# EAGLE board Qwiic Twist-Panel (EAGLE 9.2.1), part 1 of 3
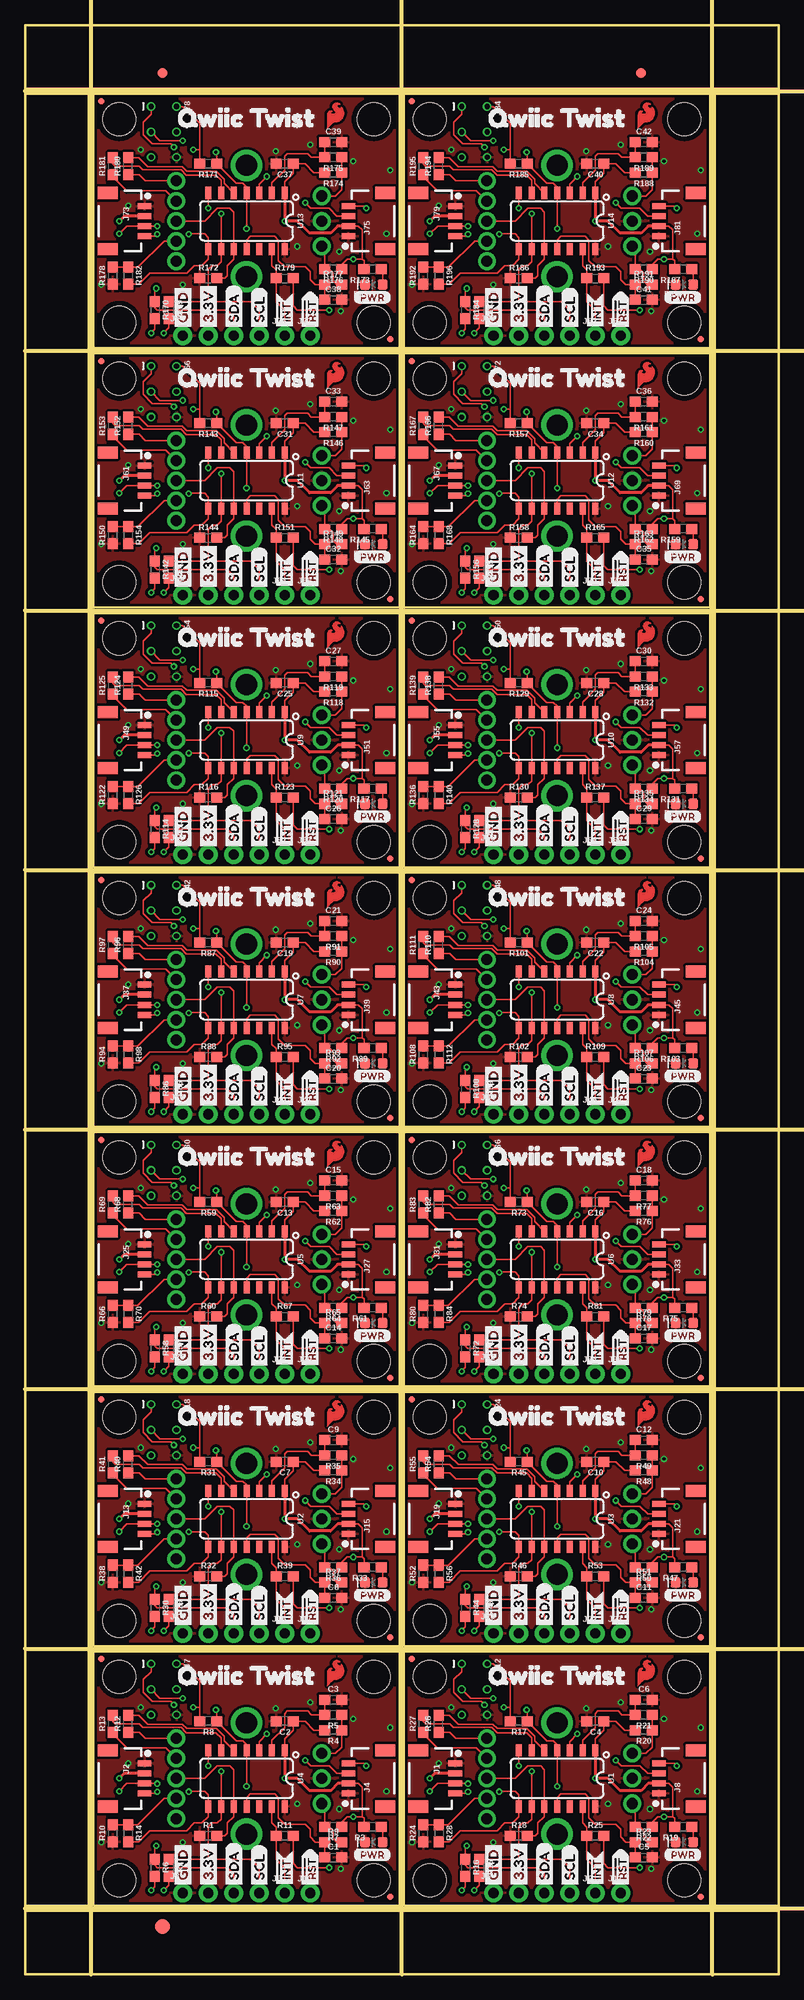
[diagram p0: board, top side]
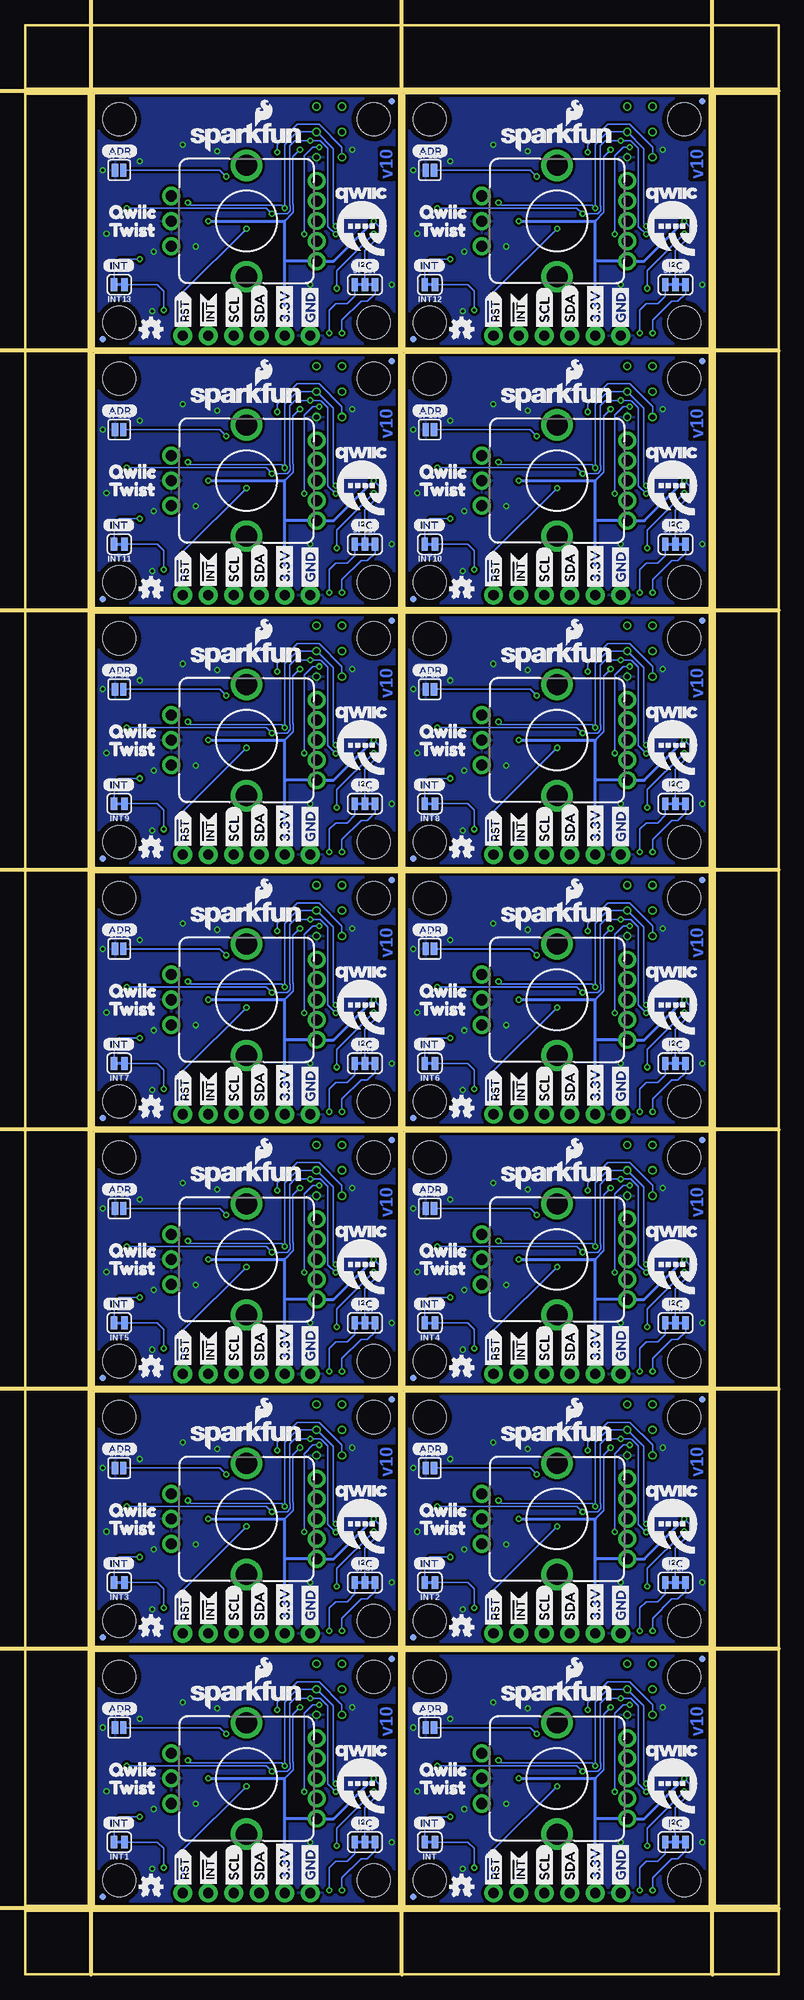
[diagram p1: board, bottom side, seen from below]

Size 75.18 x 194.56 mm. Coordinates in mm from the lower left corner, seen from the top.
Outline: 6.86,6.86 6.86,32.26 37.34,32.26 37.34,6.86 6.86,6.86
Outline: 37.85,6.86 37.85,32.26 68.33,32.26 68.33,6.86 37.85,6.86
Outline: 6.86,32.77 6.86,58.17 37.34,58.17 37.34,32.77 6.86,32.77
Outline: 37.85,32.77 37.85,58.17 68.33,58.17 68.33,32.77 37.85,32.77
Outline: 6.86,58.67 6.86,84.07 37.34,84.07 37.34,58.67 6.86,58.67
Outline: 37.85,58.67 37.85,84.07 68.33,84.07 68.33,58.67 37.85,58.67
Outline: 6.86,84.58 6.86,109.98 37.34,109.98 37.34,84.58 6.86,84.58
Outline: 37.85,84.58 37.85,109.98 68.33,109.98 68.33,84.58 37.85,84.58
Outline: 6.86,110.49 6.86,135.89 37.34,135.89 37.34,110.49 6.86,110.49
Outline: 37.85,110.49 37.85,135.89 68.33,135.89 68.33,110.49 37.85,110.49
Outline: 6.86,136.4 6.86,161.8 37.34,161.8 37.34,136.4 6.86,136.4
Outline: 37.85,136.4 37.85,161.8 68.33,161.8 68.33,136.4 37.85,136.4
Outline: 6.86,162.31 6.86,187.71 37.34,187.71 37.34,162.31 6.86,162.31
Outline: 37.85,162.31 37.85,187.71 68.33,187.71 68.33,162.31 37.85,162.31
Outline: 0,6.35 75.18,6.35 75.18,0 0,0 0,6.35
Outline: 68.83,187.71 75.18,187.71 75.18,6.86 68.83,6.86 68.83,187.71
Outline: 0,194.56 75.18,194.56 75.18,188.21 0,188.21 0,194.56
Outline: 0,187.71 6.35,187.71 6.35,6.86 0,6.86 0,187.71
Copper layers (1*16): Top 0.035mm / dielectric 1.5mm / Bottom 0.035mm
Design rules "SparkFun-2-layer-PCBWay-LIMIT": minimum track width 6mil, minimum drill 0.3mm, track to track 6mil, track to pad 6mil, pad to pad 6mil, via to via 6mil, smd to smd 6mil, copper to edge 6mil, drill to drill 6mil, minimum pad ring 6mil, minimum via ring 6mil, stop-mask expansion 4mil, vias tented up to drill 25mil, thermal gap 10mil
Milling: 11 lines

## Footprints (pad centres in the part's own frame; a part is rotated, then mirrored left to right if it is on the bottom)
0603 = smd 1.1 x 1: 1 -0.85,0; 2 0.85,0
LED-0603 = smd 1 x 1: A -0.877,0; C 0.877,0
FIDUCIAL-1X2 = smd 1 x 1: 1 0,0
FIDUCIAL-1.5X3 = smd 1.5 x 1.5: 1 0,0
SMT-JUMPER_2_NC_TRACE_SILK = smd 0.635 x 1.27: 1 -0.508,0; 2 0.508,0
1X04_1MM_RA = smd 0.6 x 1.35: 1 -1.5,0; 2 -0.5,0; 3 0.5,0; 4 1.5,0 | smd 1.2 x 2: NC1 2.8,-3.675; NC2 -2.8,-3.675
1X04_NO_SILK = drill 1.016 pad 1.88: 1 0,0; 2 2.54,0; 3 5.08,0; 4 7.62,0
1X01_NO_SILK = drill 1.016 pad 1.88: 1 0,0
2X3_TEST_POINTS = drill 0.508: 1 -2.54,-1.27; 2 -2.54,1.27; 3 0,-1.27; 4 0,1.27; 5 2.54,-1.27; 6 2.54,1.27
MICRO-FIDUCIAL = smd 0.635 x 0.635: 1 0,0
STAND-OFF = hole 3.302: 0,0
SMT-JUMPER_2_NO_SILK = smd 0.635 x 1.27: 1 -0.406,0; 2 0.406,0
SMT-JUMPER_3_2-NC_TRACE_SILK = smd 0.635 x 1.27: 1 -1.016,0; 2 0,0; 3 1.016,0
ENCODER_LED_3_KIT = drill 1.1 pad 1.778: 1 -4,7; 2 -2,7; 3 0,7; 4 2,7; 5 4,7 | drill 1.1 pad 1.8: A -2.5,-7.5; B 2.5,-7.5; C 0,-7.5 | drill 2.1: M1 -5.55,0; M2 5.55,0
SO14 = smd 0.6 x 1.2: 1 -3.175,-2.8; 2 -1.905,-2.8; 3 -0.635,-2.8; 4 0.635,-2.8; 5 1.905,-2.8; 6 3.175,-2.8; 7 4.445,-2.8; 8 4.445,2.8; 9 3.175,2.8; 10 1.905,2.8; 11 0.635,2.8; 12 -0.635,2.8; 13 -1.905,2.8; 14 -3.175,2.8

## Placement (x,y rotation side)
C1  10nF  [0603]  30.73,11.68 0 top
C2  0.1uF  [0603]  25.91,25.27 180 top
C3  10nF  [0603]  30.73,27.43 0 top
C4  0.1uF  [0603]  56.9,25.27 180 top
C5  10nF  [0603]  61.72,11.68 0 top
C6  10nF  [0603]  61.72,27.43 0 top
C7  0.1uF  [0603]  25.91,51.18 180 top
C8  10nF  [0603]  30.73,37.59 0 top
C9  10nF  [0603]  30.73,53.34 0 top
C10  0.1uF  [0603]  56.9,51.18 180 top
C11  10nF  [0603]  61.72,37.59 0 top
C12  10nF  [0603]  61.72,53.34 0 top
C13  0.1uF  [0603]  25.91,77.09 180 top
C14  10nF  [0603]  30.73,63.5 0 top
C15  10nF  [0603]  30.73,79.25 0 top
C16  0.1uF  [0603]  56.9,77.09 180 top
C17  10nF  [0603]  61.72,63.5 0 top
C18  10nF  [0603]  61.72,79.25 0 top
C19  0.1uF  [0603]  25.91,103 180 top
C20  10nF  [0603]  30.73,89.41 0 top
C21  10nF  [0603]  30.73,105.16 0 top
C22  0.1uF  [0603]  56.9,103 180 top
C23  10nF  [0603]  61.72,89.41 0 top
C24  10nF  [0603]  61.72,105.16 0 top
C25  0.1uF  [0603]  25.91,128.91 180 top
C26  10nF  [0603]  30.73,115.32 0 top
C27  10nF  [0603]  30.73,131.06 0 top
C28  0.1uF  [0603]  56.9,128.91 180 top
C29  10nF  [0603]  61.72,115.32 0 top
C30  10nF  [0603]  61.72,131.06 0 top
C31  0.1uF  [0603]  25.91,154.81 180 top
C32  10nF  [0603]  30.73,141.22 0 top
C33  10nF  [0603]  30.73,156.97 0 top
C34  0.1uF  [0603]  56.9,154.81 180 top
C35  10nF  [0603]  61.72,141.22 0 top
C36  10nF  [0603]  61.72,156.97 0 top
C37  0.1uF  [0603]  25.91,180.72 180 top
C38  10nF  [0603]  30.73,167.13 0 top
C39  10nF  [0603]  30.73,182.88 0 top
C40  0.1uF  [0603]  56.9,180.72 180 top
C41  10nF  [0603]  61.72,167.13 0 top
C42  10nF  [0603]  61.72,182.88 0 top
D1  RED  [LED-0603]  34.8,13.21 180 top
D2  RED  [LED-0603]  65.79,13.21 180 top
D3  RED  [LED-0603]  34.8,39.12 180 top
D4  RED  [LED-0603]  65.79,39.12 180 top
D5  RED  [LED-0603]  34.8,65.02 180 top
D6  RED  [LED-0603]  65.79,65.02 180 top
D7  RED  [LED-0603]  34.8,90.93 180 top
D8  RED  [LED-0603]  65.79,90.93 180 top
D9  RED  [LED-0603]  34.8,116.84 180 top
D10  RED  [LED-0603]  65.79,116.84 180 top
D11  RED  [LED-0603]  34.8,142.75 180 top
D12  RED  [LED-0603]  65.79,142.75 180 top
D13  RED  [LED-0603]  34.8,168.66 180 top
D14  RED  [LED-0603]  65.79,168.66 180 top
E$1  [FIDUCIAL-1X2]  13.72,189.8 0 top
E$2  [FIDUCIAL-1X2]  61.47,189.8 0 top
E$3  [FIDUCIAL-1.5X3]  13.72,4.76 0 top
INT  [SMT-JUMPER_2_NC_TRACE_SILK]  34.8,13.21 180 bottom
INT1  [SMT-JUMPER_2_NC_TRACE_SILK]  65.79,13.21 180 bottom
INT2  [SMT-JUMPER_2_NC_TRACE_SILK]  34.8,39.12 180 bottom
INT3  [SMT-JUMPER_2_NC_TRACE_SILK]  65.79,39.12 180 bottom
INT4  [SMT-JUMPER_2_NC_TRACE_SILK]  34.8,65.02 180 bottom
INT5  [SMT-JUMPER_2_NC_TRACE_SILK]  65.79,65.02 180 bottom
INT6  [SMT-JUMPER_2_NC_TRACE_SILK]  34.8,90.93 180 bottom
INT7  [SMT-JUMPER_2_NC_TRACE_SILK]  65.79,90.93 180 bottom
INT8  [SMT-JUMPER_2_NC_TRACE_SILK]  34.8,116.84 180 bottom
INT9  [SMT-JUMPER_2_NC_TRACE_SILK]  65.79,116.84 180 bottom
INT10  [SMT-JUMPER_2_NC_TRACE_SILK]  34.8,142.75 180 bottom
INT11  [SMT-JUMPER_2_NC_TRACE_SILK]  65.79,142.75 180 bottom
INT12  [SMT-JUMPER_2_NC_TRACE_SILK]  34.8,168.66 180 bottom
INT13  [SMT-JUMPER_2_NC_TRACE_SILK]  65.79,168.66 180 bottom
J1  [1X04_1MM_RA]  42.93,19.56 270 top
J2  [1X04_1MM_RA]  11.94,19.56 270 top
J3  PTH  [1X04_NO_SILK]  15.75,8.13 0 top
J4  [1X04_1MM_RA]  32.26,19.56 90 top
J5  [1X01_NO_SILK]  25.91,8.13 0 top
J6  PTH  [1X04_NO_SILK]  46.74,8.13 0 top
J7  ISP  [2X3_TEST_POINTS]  13.84,28.45 270 top
J8  [1X04_1MM_RA]  63.25,19.56 90 top
J9  [1X01_NO_SILK]  56.9,8.13 0 top
J10  [1X01_NO_SILK]  28.45,8.13 0 top
J11  [1X01_NO_SILK]  59.44,8.13 0 top
J12  ISP  [2X3_TEST_POINTS]  44.83,28.45 270 top
J13  [1X04_1MM_RA]  11.94,45.47 270 top
J14  PTH  [1X04_NO_SILK]  15.75,34.04 0 top
J15  [1X04_1MM_RA]  32.26,45.47 90 top
J16  [1X01_NO_SILK]  25.91,34.04 0 top
J17  [1X01_NO_SILK]  28.45,34.04 0 top
J18  ISP  [2X3_TEST_POINTS]  13.84,54.36 270 top
J19  [1X04_1MM_RA]  42.93,45.47 270 top
J20  PTH  [1X04_NO_SILK]  46.74,34.04 0 top
J21  [1X04_1MM_RA]  63.25,45.47 90 top
J22  [1X01_NO_SILK]  56.9,34.04 0 top
J23  [1X01_NO_SILK]  59.44,34.04 0 top
J24  ISP  [2X3_TEST_POINTS]  44.83,54.36 270 top
J25  [1X04_1MM_RA]  11.94,71.37 270 top
J26  PTH  [1X04_NO_SILK]  15.75,59.94 0 top
J27  [1X04_1MM_RA]  32.26,71.37 90 top
J28  [1X01_NO_SILK]  25.91,59.94 0 top
J29  [1X01_NO_SILK]  28.45,59.94 0 top
J30  ISP  [2X3_TEST_POINTS]  13.84,80.26 270 top
J31  [1X04_1MM_RA]  42.93,71.37 270 top
J32  PTH  [1X04_NO_SILK]  46.74,59.94 0 top
J33  [1X04_1MM_RA]  63.25,71.37 90 top
J34  [1X01_NO_SILK]  56.9,59.94 0 top
J35  [1X01_NO_SILK]  59.44,59.94 0 top
J36  ISP  [2X3_TEST_POINTS]  44.83,80.26 270 top
J37  [1X04_1MM_RA]  11.94,97.28 270 top
J38  PTH  [1X04_NO_SILK]  15.75,85.85 0 top
J39  [1X04_1MM_RA]  32.26,97.28 90 top
J40  [1X01_NO_SILK]  25.91,85.85 0 top
J41  [1X01_NO_SILK]  28.45,85.85 0 top
J42  ISP  [2X3_TEST_POINTS]  13.84,106.17 270 top
J43  [1X04_1MM_RA]  42.93,97.28 270 top
J44  PTH  [1X04_NO_SILK]  46.74,85.85 0 top
J45  [1X04_1MM_RA]  63.25,97.28 90 top
J46  [1X01_NO_SILK]  56.9,85.85 0 top
J47  [1X01_NO_SILK]  59.44,85.85 0 top
J48  ISP  [2X3_TEST_POINTS]  44.83,106.17 270 top
J49  [1X04_1MM_RA]  11.94,123.19 270 top
J50  PTH  [1X04_NO_SILK]  15.75,111.76 0 top
J51  [1X04_1MM_RA]  32.26,123.19 90 top
J52  [1X01_NO_SILK]  25.91,111.76 0 top
J53  [1X01_NO_SILK]  28.45,111.76 0 top
J54  ISP  [2X3_TEST_POINTS]  13.84,132.08 270 top
J55  [1X04_1MM_RA]  42.93,123.19 270 top
J56  PTH  [1X04_NO_SILK]  46.74,111.76 0 top
J57  [1X04_1MM_RA]  63.25,123.19 90 top
J58  [1X01_NO_SILK]  56.9,111.76 0 top
J59  [1X01_NO_SILK]  59.44,111.76 0 top
J60  ISP  [2X3_TEST_POINTS]  44.83,132.08 270 top
J61  [1X04_1MM_RA]  11.94,149.1 270 top
J62  PTH  [1X04_NO_SILK]  15.75,137.67 0 top
J63  [1X04_1MM_RA]  32.26,149.1 90 top
J64  [1X01_NO_SILK]  25.91,137.67 0 top
J65  [1X01_NO_SILK]  28.45,137.67 0 top
J66  ISP  [2X3_TEST_POINTS]  13.84,157.99 270 top
J67  [1X04_1MM_RA]  42.93,149.1 270 top
J68  PTH  [1X04_NO_SILK]  46.74,137.67 0 top
J69  [1X04_1MM_RA]  63.25,149.1 90 top
J70  [1X01_NO_SILK]  56.9,137.67 0 top
J71  [1X01_NO_SILK]  59.44,137.67 0 top
J72  ISP  [2X3_TEST_POINTS]  44.83,157.99 270 top
J73  [1X04_1MM_RA]  11.94,175.01 270 top
J74  PTH  [1X04_NO_SILK]  15.75,163.58 0 top
J75  [1X04_1MM_RA]  32.26,175.01 90 top
J76  [1X01_NO_SILK]  25.91,163.58 0 top
J77  [1X01_NO_SILK]  28.45,163.58 0 top
J78  ISP  [2X3_TEST_POINTS]  13.84,183.9 270 top
J79  [1X04_1MM_RA]  42.93,175.01 270 top
J80  PTH  [1X04_NO_SILK]  46.74,163.58 0 top
J81  [1X04_1MM_RA]  63.25,175.01 90 top
J82  [1X01_NO_SILK]  56.9,163.58 0 top
J83  [1X01_NO_SILK]  59.44,163.58 0 top
J84  ISP  [2X3_TEST_POINTS]  44.83,183.9 270 top
JP1  FIDUCIALUFIDUCIAL  [MICRO-FIDUCIAL]  7.62,31.5 0 bottom
JP2  FIDUCIALUFIDUCIAL  [MICRO-FIDUCIAL]  36.45,7.75 0 top
JP3  STAND-OFF  [STAND-OFF]  9.4,29.72 0 top
JP4  STAND-OFF  [STAND-OFF]  34.8,29.72 0 top
JP5  FIDUCIALUFIDUCIAL  [MICRO-FIDUCIAL]  36.45,7.75 0 bottom
JP6  FIDUCIALUFIDUCIAL  [MICRO-FIDUCIAL]  7.62,31.5 0 top
JP7  ADR  [SMT-JUMPER_2_NO_SILK]  34.8,24.64 0 bottom
JP8  STAND-OFF  [STAND-OFF]  40.39,29.72 0 top
JP9  [SMT-JUMPER_3_2-NC_TRACE_SILK]  10.29,13.21 0 bottom
JP10  STAND-OFF  [STAND-OFF]  65.79,29.72 0 top
JP11  STAND-OFF  [STAND-OFF]  9.4,9.4 0 top
JP12  FIDUCIALUFIDUCIAL  [MICRO-FIDUCIAL]  67.44,7.75 0 top
JP13  STAND-OFF  [STAND-OFF]  34.8,9.4 0 top
JP14  FIDUCIALUFIDUCIAL  [MICRO-FIDUCIAL]  38.61,31.5 0 top
JP15  FIDUCIALUFIDUCIAL  [MICRO-FIDUCIAL]  67.44,7.75 0 bottom
JP16  ADR  [SMT-JUMPER_2_NO_SILK]  65.79,24.64 0 bottom
JP17  [SMT-JUMPER_3_2-NC_TRACE_SILK]  41.27,13.21 0 bottom
JP18  STAND-OFF  [STAND-OFF]  40.39,9.4 0 top
JP19  STAND-OFF  [STAND-OFF]  65.79,9.4 0 top
JP20  FIDUCIALUFIDUCIAL  [MICRO-FIDUCIAL]  38.61,31.5 0 bottom
JP21  STAND-OFF  [STAND-OFF]  9.4,55.63 0 top
JP22  STAND-OFF  [STAND-OFF]  34.8,55.63 0 top
JP23  FIDUCIALUFIDUCIAL  [MICRO-FIDUCIAL]  36.45,33.66 0 top
JP24  FIDUCIALUFIDUCIAL  [MICRO-FIDUCIAL]  7.62,57.4 0 top
JP25  FIDUCIALUFIDUCIAL  [MICRO-FIDUCIAL]  36.45,33.66 0 bottom
JP26  ADR  [SMT-JUMPER_2_NO_SILK]  34.8,50.55 0 bottom
JP27  [SMT-JUMPER_3_2-NC_TRACE_SILK]  10.29,39.12 0 bottom
JP28  STAND-OFF  [STAND-OFF]  9.4,35.31 0 top
JP29  STAND-OFF  [STAND-OFF]  34.8,35.31 0 top
JP30  FIDUCIALUFIDUCIAL  [MICRO-FIDUCIAL]  7.62,57.4 0 bottom
JP31  STAND-OFF  [STAND-OFF]  40.39,55.63 0 top
JP32  STAND-OFF  [STAND-OFF]  65.79,55.63 0 top
JP33  FIDUCIALUFIDUCIAL  [MICRO-FIDUCIAL]  67.44,33.66 0 top
JP34  FIDUCIALUFIDUCIAL  [MICRO-FIDUCIAL]  38.61,57.4 0 top
JP35  FIDUCIALUFIDUCIAL  [MICRO-FIDUCIAL]  67.44,33.66 0 bottom
JP36  ADR  [SMT-JUMPER_2_NO_SILK]  65.79,50.55 0 bottom
JP37  [SMT-JUMPER_3_2-NC_TRACE_SILK]  41.27,39.12 0 bottom
JP38  STAND-OFF  [STAND-OFF]  40.39,35.31 0 top
JP39  STAND-OFF  [STAND-OFF]  65.79,35.31 0 top
JP40  FIDUCIALUFIDUCIAL  [MICRO-FIDUCIAL]  38.61,57.4 0 bottom
JP41  STAND-OFF  [STAND-OFF]  9.4,81.53 0 top
JP42  STAND-OFF  [STAND-OFF]  34.8,81.53 0 top
JP43  FIDUCIALUFIDUCIAL  [MICRO-FIDUCIAL]  36.45,59.56 0 top
JP44  FIDUCIALUFIDUCIAL  [MICRO-FIDUCIAL]  7.62,83.31 0 top
JP45  FIDUCIALUFIDUCIAL  [MICRO-FIDUCIAL]  36.45,59.56 0 bottom
JP46  ADR  [SMT-JUMPER_2_NO_SILK]  34.8,76.45 0 bottom
JP47  [SMT-JUMPER_3_2-NC_TRACE_SILK]  10.29,65.02 0 bottom
JP48  STAND-OFF  [STAND-OFF]  9.4,61.21 0 top
JP49  STAND-OFF  [STAND-OFF]  34.8,61.21 0 top
JP50  FIDUCIALUFIDUCIAL  [MICRO-FIDUCIAL]  7.62,83.31 0 bottom
JP51  STAND-OFF  [STAND-OFF]  40.39,81.53 0 top
JP52  STAND-OFF  [STAND-OFF]  65.79,81.53 0 top
JP53  FIDUCIALUFIDUCIAL  [MICRO-FIDUCIAL]  67.44,59.56 0 top
JP54  FIDUCIALUFIDUCIAL  [MICRO-FIDUCIAL]  38.61,83.31 0 top
JP55  FIDUCIALUFIDUCIAL  [MICRO-FIDUCIAL]  67.44,59.56 0 bottom
JP56  ADR  [SMT-JUMPER_2_NO_SILK]  65.79,76.45 0 bottom
JP57  [SMT-JUMPER_3_2-NC_TRACE_SILK]  41.27,65.02 0 bottom
JP58  STAND-OFF  [STAND-OFF]  40.39,61.21 0 top
JP59  STAND-OFF  [STAND-OFF]  65.79,61.21 0 top
JP60  FIDUCIALUFIDUCIAL  [MICRO-FIDUCIAL]  38.61,83.31 0 bottom
JP61  STAND-OFF  [STAND-OFF]  9.4,107.44 0 top
JP62  STAND-OFF  [STAND-OFF]  34.8,107.44 0 top
JP63  FIDUCIALUFIDUCIAL  [MICRO-FIDUCIAL]  36.45,85.47 0 top
JP64  FIDUCIALUFIDUCIAL  [MICRO-FIDUCIAL]  7.62,109.22 0 top
JP65  FIDUCIALUFIDUCIAL  [MICRO-FIDUCIAL]  36.45,85.47 0 bottom
JP66  ADR  [SMT-JUMPER_2_NO_SILK]  34.8,102.36 0 bottom
JP67  [SMT-JUMPER_3_2-NC_TRACE_SILK]  10.29,90.93 0 bottom
JP68  STAND-OFF  [STAND-OFF]  9.4,87.12 0 top
JP69  STAND-OFF  [STAND-OFF]  34.8,87.12 0 top
JP70  FIDUCIALUFIDUCIAL  [MICRO-FIDUCIAL]  7.62,109.22 0 bottom
JP71  STAND-OFF  [STAND-OFF]  40.39,107.44 0 top
JP72  STAND-OFF  [STAND-OFF]  65.79,107.44 0 top
JP73  FIDUCIALUFIDUCIAL  [MICRO-FIDUCIAL]  67.44,85.47 0 top
JP74  FIDUCIALUFIDUCIAL  [MICRO-FIDUCIAL]  38.61,109.22 0 top
JP75  FIDUCIALUFIDUCIAL  [MICRO-FIDUCIAL]  67.44,85.47 0 bottom
JP76  ADR  [SMT-JUMPER_2_NO_SILK]  65.79,102.36 0 bottom
JP77  [SMT-JUMPER_3_2-NC_TRACE_SILK]  41.27,90.93 0 bottom
JP78  STAND-OFF  [STAND-OFF]  40.39,87.12 0 top
JP79  STAND-OFF  [STAND-OFF]  65.79,87.12 0 top
JP80  FIDUCIALUFIDUCIAL  [MICRO-FIDUCIAL]  38.61,109.22 0 bottom
JP81  STAND-OFF  [STAND-OFF]  9.4,133.35 0 top
JP82  STAND-OFF  [STAND-OFF]  34.8,133.35 0 top
JP83  FIDUCIALUFIDUCIAL  [MICRO-FIDUCIAL]  36.45,111.38 0 top
JP84  FIDUCIALUFIDUCIAL  [MICRO-FIDUCIAL]  7.62,135.13 0 top
JP85  FIDUCIALUFIDUCIAL  [MICRO-FIDUCIAL]  36.45,111.38 0 bottom
JP86  ADR  [SMT-JUMPER_2_NO_SILK]  34.8,128.27 0 bottom
JP87  [SMT-JUMPER_3_2-NC_TRACE_SILK]  10.29,116.84 0 bottom
JP88  STAND-OFF  [STAND-OFF]  9.4,113.03 0 top
JP89  STAND-OFF  [STAND-OFF]  34.8,113.03 0 top
JP90  FIDUCIALUFIDUCIAL  [MICRO-FIDUCIAL]  7.62,135.13 0 bottom
JP91  STAND-OFF  [STAND-OFF]  40.39,133.35 0 top
JP92  STAND-OFF  [STAND-OFF]  65.79,133.35 0 top
JP93  FIDUCIALUFIDUCIAL  [MICRO-FIDUCIAL]  67.44,111.38 0 top
JP94  FIDUCIALUFIDUCIAL  [MICRO-FIDUCIAL]  38.61,135.13 0 top
JP95  FIDUCIALUFIDUCIAL  [MICRO-FIDUCIAL]  67.44,111.38 0 bottom
JP96  ADR  [SMT-JUMPER_2_NO_SILK]  65.79,128.27 0 bottom
JP97  [SMT-JUMPER_3_2-NC_TRACE_SILK]  41.27,116.84 0 bottom
JP98  STAND-OFF  [STAND-OFF]  40.39,113.03 0 top
JP99  STAND-OFF  [STAND-OFF]  65.79,113.03 0 top
JP100  FIDUCIALUFIDUCIAL  [MICRO-FIDUCIAL]  38.61,135.13 0 bottom
JP101  STAND-OFF  [STAND-OFF]  9.4,159.26 0 top
JP102  STAND-OFF  [STAND-OFF]  34.8,159.26 0 top
JP103  FIDUCIALUFIDUCIAL  [MICRO-FIDUCIAL]  36.45,137.29 0 top
JP104  FIDUCIALUFIDUCIAL  [MICRO-FIDUCIAL]  7.62,161.04 0 top
JP105  FIDUCIALUFIDUCIAL  [MICRO-FIDUCIAL]  36.45,137.29 0 bottom
JP106  ADR  [SMT-JUMPER_2_NO_SILK]  34.8,154.18 0 bottom
JP107  [SMT-JUMPER_3_2-NC_TRACE_SILK]  10.29,142.75 0 bottom
JP108  STAND-OFF  [STAND-OFF]  9.4,138.94 0 top
JP109  STAND-OFF  [STAND-OFF]  34.8,138.94 0 top
JP110  FIDUCIALUFIDUCIAL  [MICRO-FIDUCIAL]  7.62,161.04 0 bottom
JP111  STAND-OFF  [STAND-OFF]  40.39,159.26 0 top
JP112  STAND-OFF  [STAND-OFF]  65.79,159.26 0 top
JP113  FIDUCIALUFIDUCIAL  [MICRO-FIDUCIAL]  67.44,137.29 0 top
JP114  FIDUCIALUFIDUCIAL  [MICRO-FIDUCIAL]  38.61,161.04 0 top
JP115  FIDUCIALUFIDUCIAL  [MICRO-FIDUCIAL]  67.44,137.29 0 bottom
JP116  ADR  [SMT-JUMPER_2_NO_SILK]  65.79,154.18 0 bottom
JP117  [SMT-JUMPER_3_2-NC_TRACE_SILK]  41.27,142.75 0 bottom
JP118  STAND-OFF  [STAND-OFF]  40.39,138.94 0 top
JP119  STAND-OFF  [STAND-OFF]  65.79,138.94 0 top
JP120  FIDUCIALUFIDUCIAL  [MICRO-FIDUCIAL]  38.61,161.04 0 bottom
JP121  STAND-OFF  [STAND-OFF]  9.4,185.17 0 top
JP122  STAND-OFF  [STAND-OFF]  34.8,185.17 0 top
JP123  FIDUCIALUFIDUCIAL  [MICRO-FIDUCIAL]  36.45,163.19 0 top
JP124  FIDUCIALUFIDUCIAL  [MICRO-FIDUCIAL]  7.62,186.94 0 top
JP125  FIDUCIALUFIDUCIAL  [MICRO-FIDUCIAL]  36.45,163.19 0 bottom
JP126  ADR  [SMT-JUMPER_2_NO_SILK]  34.8,180.09 0 bottom
JP127  [SMT-JUMPER_3_2-NC_TRACE_SILK]  10.29,168.66 0 bottom
JP128  STAND-OFF  [STAND-OFF]  9.4,164.85 0 top
JP129  STAND-OFF  [STAND-OFF]  34.8,164.85 0 top
JP130  FIDUCIALUFIDUCIAL  [MICRO-FIDUCIAL]  7.62,186.94 0 bottom
JP131  STAND-OFF  [STAND-OFF]  40.39,185.17 0 top
JP132  STAND-OFF  [STAND-OFF]  65.79,185.17 0 top
JP133  FIDUCIALUFIDUCIAL  [MICRO-FIDUCIAL]  67.44,163.19 0 top
JP134  FIDUCIALUFIDUCIAL  [MICRO-FIDUCIAL]  38.61,186.94 0 top
JP135  FIDUCIALUFIDUCIAL  [MICRO-FIDUCIAL]  67.44,163.19 0 bottom
JP136  ADR  [SMT-JUMPER_2_NO_SILK]  65.79,180.09 0 bottom
JP137  [SMT-JUMPER_3_2-NC_TRACE_SILK]  41.27,168.66 0 bottom
JP138  STAND-OFF  [STAND-OFF]  40.39,164.85 0 top
JP139  STAND-OFF  [STAND-OFF]  65.79,164.85 0 top
JP140  FIDUCIALUFIDUCIAL  [MICRO-FIDUCIAL]  38.61,186.94 0 bottom
LOGO1  OSHW-LOGOMINI  [OSHW-LOGO-MINI]  31.62,8.76 0 bottom
LOGO2  SFE_LOGO_NAME_FLAME.1_INCH  [SFE_LOGO_NAME_FLAME_.1]  22.1,27.94 0 bottom
LOGO3  SFE_LOGO_FLAME.1EXP  [SFE_LOGO_FLAME_COPPER_EXPOSED_.1]  30.99,30.1 0 top
LOGO4  OSHW-LOGOMINI  [OSHW-LOGO-MINI]  62.61,8.76 0 bottom
LOGO5  SFE_LOGO_NAME_FLAME.1_INCH  [SFE_LOGO_NAME_FLAME_.1]  53.09,27.94 0 bottom
LOGO6  SFE_LOGO_FLAME.1EXP  [SFE_LOGO_FLAME_COPPER_EXPOSED_.1]  61.98,30.1 0 top
LOGO7  OSHW-LOGOMINI  [OSHW-LOGO-MINI]  31.62,34.67 0 bottom
LOGO8  SFE_LOGO_NAME_FLAME.1_INCH  [SFE_LOGO_NAME_FLAME_.1]  22.1,53.85 0 bottom
LOGO9  SFE_LOGO_FLAME.1EXP  [SFE_LOGO_FLAME_COPPER_EXPOSED_.1]  30.99,56.01 0 top
LOGO10  OSHW-LOGOMINI  [OSHW-LOGO-MINI]  62.61,34.67 0 bottom
LOGO11  SFE_LOGO_NAME_FLAME.1_INCH  [SFE_LOGO_NAME_FLAME_.1]  53.09,53.85 0 bottom
LOGO12  SFE_LOGO_FLAME.1EXP  [SFE_LOGO_FLAME_COPPER_EXPOSED_.1]  61.98,56.01 0 top
LOGO13  OSHW-LOGOMINI  [OSHW-LOGO-MINI]  31.62,60.58 0 bottom
LOGO14  SFE_LOGO_NAME_FLAME.1_INCH  [SFE_LOGO_NAME_FLAME_.1]  22.1,79.76 0 bottom
LOGO15  SFE_LOGO_FLAME.1EXP  [SFE_LOGO_FLAME_COPPER_EXPOSED_.1]  30.99,81.92 0 top
LOGO16  OSHW-LOGOMINI  [OSHW-LOGO-MINI]  62.61,60.58 0 bottom
LOGO17  SFE_LOGO_NAME_FLAME.1_INCH  [SFE_LOGO_NAME_FLAME_.1]  53.09,79.76 0 bottom
LOGO18  SFE_LOGO_FLAME.1EXP  [SFE_LOGO_FLAME_COPPER_EXPOSED_.1]  61.98,81.92 0 top
LOGO19  OSHW-LOGOMINI  [OSHW-LOGO-MINI]  31.62,86.49 0 bottom
LOGO20  SFE_LOGO_NAME_FLAME.1_INCH  [SFE_LOGO_NAME_FLAME_.1]  22.1,105.66 0 bottom
LOGO21  SFE_LOGO_FLAME.1EXP  [SFE_LOGO_FLAME_COPPER_EXPOSED_.1]  30.99,107.82 0 top
LOGO22  OSHW-LOGOMINI  [OSHW-LOGO-MINI]  62.61,86.49 0 bottom
LOGO23  SFE_LOGO_NAME_FLAME.1_INCH  [SFE_LOGO_NAME_FLAME_.1]  53.09,105.66 0 bottom
LOGO24  SFE_LOGO_FLAME.1EXP  [SFE_LOGO_FLAME_COPPER_EXPOSED_.1]  61.98,107.82 0 top
LOGO25  OSHW-LOGOMINI  [OSHW-LOGO-MINI]  31.62,112.4 0 bottom
LOGO26  SFE_LOGO_NAME_FLAME.1_INCH  [SFE_LOGO_NAME_FLAME_.1]  22.1,131.57 0 bottom
LOGO27  SFE_LOGO_FLAME.1EXP  [SFE_LOGO_FLAME_COPPER_EXPOSED_.1]  30.99,133.73 0 top
LOGO28  OSHW-LOGOMINI  [OSHW-LOGO-MINI]  62.61,112.4 0 bottom
LOGO29  SFE_LOGO_NAME_FLAME.1_INCH  [SFE_LOGO_NAME_FLAME_.1]  53.09,131.57 0 bottom
LOGO30  SFE_LOGO_FLAME.1EXP  [SFE_LOGO_FLAME_COPPER_EXPOSED_.1]  61.98,133.73 0 top
LOGO31  OSHW-LOGOMINI  [OSHW-LOGO-MINI]  31.62,138.3 0 bottom
LOGO32  SFE_LOGO_NAME_FLAME.1_INCH  [SFE_LOGO_NAME_FLAME_.1]  22.1,157.48 0 bottom
LOGO33  SFE_LOGO_FLAME.1EXP  [SFE_LOGO_FLAME_COPPER_EXPOSED_.1]  30.99,159.64 0 top
LOGO34  OSHW-LOGOMINI  [OSHW-LOGO-MINI]  62.61,138.3 0 bottom
LOGO35  SFE_LOGO_NAME_FLAME.1_INCH  [SFE_LOGO_NAME_FLAME_.1]  53.09,157.48 0 bottom
LOGO36  SFE_LOGO_FLAME.1EXP  [SFE_LOGO_FLAME_COPPER_EXPOSED_.1]  61.98,159.64 0 top
LOGO37  OSHW-LOGOMINI  [OSHW-LOGO-MINI]  31.62,164.21 0 bottom
LOGO38  SFE_LOGO_NAME_FLAME.1_INCH  [SFE_LOGO_NAME_FLAME_.1]  22.1,183.39 0 bottom
LOGO39  SFE_LOGO_FLAME.1EXP  [SFE_LOGO_FLAME_COPPER_EXPOSED_.1]  30.99,185.55 0 top
LOGO40  OSHW-LOGOMINI  [OSHW-LOGO-MINI]  62.61,164.21 0 bottom
LOGO41  SFE_LOGO_NAME_FLAME.1_INCH  [SFE_LOGO_NAME_FLAME_.1]  53.09,183.39 0 bottom
LOGO42  SFE_LOGO_FLAME.1EXP  [SFE_LOGO_FLAME_COPPER_EXPOSED_.1]  61.98,185.55 0 top
R1  10k  [0603]  18.29,13.84 0 top
R2  2.2k  [0603]  14.35,10.67 270 top
R3  1k  [0603]  34.67,14.73 180 top
R4  10k  [0603]  30.73,24.38 180 top
R5  10k  [0603]  30.73,25.91 180 top
R6  2.2k  [0603]  12.95,10.67 270 top
R7  10k  [0603]  30.73,14.73 180 top
R8  10k  [0603]  18.29,25.27 180 top
R9  10k  [0603]  30.73,13.21 0 top
R10  DNP  [0603]  8.76,14.1 90 top
R11  10k  [0603]  25.91,13.84 0 top
R12  10  [0603]  10.29,25.02 90 top
R13  10  [0603]  8.76,25.02 90 top
R14  10  [0603]  10.29,14.1 270 top
R15  2.2k  [0603]  45.34,10.67 270 top
R16  2.2k  [0603]  43.94,10.67 270 top
R17  10k  [0603]  49.28,25.27 180 top
R18  10k  [0603]  49.28,13.84 0 top
R19  1k  [0603]  65.66,14.73 180 top
R20  10k  [0603]  61.72,24.38 180 top
R21  10k  [0603]  61.72,25.91 180 top
R22  10k  [0603]  61.72,14.73 180 top
R23  10k  [0603]  61.72,13.21 0 top
R24  DNP  [0603]  39.75,14.1 90 top
R25  10k  [0603]  56.9,13.84 0 top
R26  10  [0603]  41.27,25.02 90 top
R27  10  [0603]  39.75,25.02 90 top
R28  10  [0603]  41.27,14.1 270 top
R29  2.2k  [0603]  14.35,36.58 270 top
R30  2.2k  [0603]  12.95,36.58 270 top
R31  10k  [0603]  18.29,51.18 180 top
R32  10k  [0603]  18.29,39.75 0 top
R33  1k  [0603]  34.67,40.64 180 top
R34  10k  [0603]  30.73,50.29 180 top
R35  10k  [0603]  30.73,51.82 180 top
R36  10k  [0603]  30.73,40.64 180 top
R37  10k  [0603]  30.73,39.12 0 top
R38  DNP  [0603]  8.76,40 90 top
R39  10k  [0603]  25.91,39.75 0 top
R40  10  [0603]  10.29,50.93 90 top
R41  10  [0603]  8.76,50.93 90 top
R42  10  [0603]  10.29,40 270 top
R43  2.2k  [0603]  45.34,36.58 270 top
R44  2.2k  [0603]  43.94,36.58 270 top
R45  10k  [0603]  49.28,51.18 180 top
R46  10k  [0603]  49.28,39.75 0 top
R47  1k  [0603]  65.66,40.64 180 top
R48  10k  [0603]  61.72,50.29 180 top
R49  10k  [0603]  61.72,51.82 180 top
R50  10k  [0603]  61.72,40.64 180 top
R51  10k  [0603]  61.72,39.12 0 top
R52  DNP  [0603]  39.75,40 90 top
R53  10k  [0603]  56.9,39.75 0 top
R54  10  [0603]  41.27,50.93 90 top
R55  10  [0603]  39.75,50.93 90 top
R56  10  [0603]  41.27,40 270 top
R57  2.2k  [0603]  14.35,62.48 270 top
R58  2.2k  [0603]  12.95,62.48 270 top
R59  10k  [0603]  18.29,77.09 180 top
R60  10k  [0603]  18.29,65.66 0 top
R61  1k  [0603]  34.67,66.55 180 top
R62  10k  [0603]  30.73,76.2 180 top
R63  10k  [0603]  30.73,77.72 180 top
R64  10k  [0603]  30.73,66.55 180 top
R65  10k  [0603]  30.73,65.02 0 top
R66  DNP  [0603]  8.76,65.91 90 top
R67  10k  [0603]  25.91,65.66 0 top
R68  10  [0603]  10.29,76.84 90 top
R69  10  [0603]  8.76,76.84 90 top
R70  10  [0603]  10.29,65.91 270 top
R71  2.2k  [0603]  45.34,62.48 270 top
R72  2.2k  [0603]  43.94,62.48 270 top
R73  10k  [0603]  49.28,77.09 180 top
R74  10k  [0603]  49.28,65.66 0 top
R75  1k  [0603]  65.66,66.55 180 top
R76  10k  [0603]  61.72,76.2 180 top
R77  10k  [0603]  61.72,77.72 180 top
R78  10k  [0603]  61.72,66.55 180 top
R79  10k  [0603]  61.72,65.02 0 top
R80  DNP  [0603]  39.75,65.91 90 top
R81  10k  [0603]  56.9,65.66 0 top
R82  10  [0603]  41.27,76.84 90 top
R83  10  [0603]  39.75,76.84 90 top
R84  10  [0603]  41.27,65.91 270 top
R85  2.2k  [0603]  14.35,88.39 270 top
R86  2.2k  [0603]  12.95,88.39 270 top
R87  10k  [0603]  18.29,103 180 top
R88  10k  [0603]  18.29,91.57 0 top
R89  1k  [0603]  34.67,92.46 180 top
R90  10k  [0603]  30.73,102.11 180 top
R91  10k  [0603]  30.73,103.63 180 top
R92  10k  [0603]  30.73,92.46 180 top
R93  10k  [0603]  30.73,90.93 0 top
R94  DNP  [0603]  8.76,91.82 90 top
R95  10k  [0603]  25.91,91.57 0 top
R96  10  [0603]  10.29,102.74 90 top
R97  10  [0603]  8.76,102.74 90 top
R98  10  [0603]  10.29,91.82 270 top
R99  2.2k  [0603]  45.34,88.39 270 top
R100  2.2k  [0603]  43.94,88.39 270 top
R101  10k  [0603]  49.28,103 180 top
R102  10k  [0603]  49.28,91.57 0 top
R103  1k  [0603]  65.66,92.46 180 top
R104  10k  [0603]  61.72,102.11 180 top
R105  10k  [0603]  61.72,103.63 180 top
R106  10k  [0603]  61.72,92.46 180 top
R107  10k  [0603]  61.72,90.93 0 top
R108  DNP  [0603]  39.75,91.82 90 top
R109  10k  [0603]  56.9,91.57 0 top
R110  10  [0603]  41.27,102.74 90 top
R111  10  [0603]  39.75,102.74 90 top
R112  10  [0603]  41.27,91.82 270 top
R113  2.2k  [0603]  14.35,114.3 270 top
R114  2.2k  [0603]  12.95,114.3 270 top
R115  10k  [0603]  18.29,128.91 180 top
R116  10k  [0603]  18.29,117.48 0 top
R117  1k  [0603]  34.67,118.36 180 top
R118  10k  [0603]  30.73,128.02 180 top
R119  10k  [0603]  30.73,129.54 180 top
R120  10k  [0603]  30.73,118.36 180 top
R121  10k  [0603]  30.73,116.84 0 top
R122  DNP  [0603]  8.76,117.73 90 top
R123  10k  [0603]  25.91,117.48 0 top
R124  10  [0603]  10.29,128.65 90 top
R125  10  [0603]  8.76,128.65 90 top
R126  10  [0603]  10.29,117.73 270 top
R127  2.2k  [0603]  45.34,114.3 270 top
R128  2.2k  [0603]  43.94,114.3 270 top
R129  10k  [0603]  49.28,128.91 180 top
R130  10k  [0603]  49.28,117.48 0 top
R131  1k  [0603]  65.66,118.36 180 top
R132  10k  [0603]  61.72,128.02 180 top
R133  10k  [0603]  61.72,129.54 180 top
R134  10k  [0603]  61.72,118.36 180 top
R135  10k  [0603]  61.72,116.84 0 top
R136  DNP  [0603]  39.75,117.73 90 top
R137  10k  [0603]  56.9,117.48 0 top
R138  10  [0603]  41.27,128.65 90 top
R139  10  [0603]  39.75,128.65 90 top
R140  10  [0603]  41.27,117.73 270 top
R141  2.2k  [0603]  14.35,140.21 270 top
R142  2.2k  [0603]  12.95,140.21 270 top
R143  10k  [0603]  18.29,154.81 180 top
R144  10k  [0603]  18.29,143.38 0 top
R145  1k  [0603]  34.67,144.27 180 top
R146  10k  [0603]  30.73,153.92 180 top
R147  10k  [0603]  30.73,155.45 180 top
R148  10k  [0603]  30.73,144.27 180 top
R149  10k  [0603]  30.73,142.75 0 top
R150  DNP  [0603]  8.76,143.64 90 top
R151  10k  [0603]  25.91,143.38 0 top
R152  10  [0603]  10.29,154.56 90 top
R153  10  [0603]  8.76,154.56 90 top
R154  10  [0603]  10.29,143.64 270 top
R155  2.2k  [0603]  45.34,140.21 270 top
R156  2.2k  [0603]  43.94,140.21 270 top
R157  10k  [0603]  49.28,154.81 180 top
R158  10k  [0603]  49.28,143.38 0 top
R159  1k  [0603]  65.66,144.27 180 top
R160  10k  [0603]  61.72,153.92 180 top
R161  10k  [0603]  61.72,155.45 180 top
R162  10k  [0603]  61.72,144.27 180 top
R163  10k  [0603]  61.72,142.75 0 top
R164  DNP  [0603]  39.75,143.64 90 top
R165  10k  [0603]  56.9,143.38 0 top
R166  10  [0603]  41.27,154.56 90 top
R167  10  [0603]  39.75,154.56 90 top
R168  10  [0603]  41.27,143.64 270 top
R169  2.2k  [0603]  14.35,166.12 270 top
R170  2.2k  [0603]  12.95,166.12 270 top
R171  10k  [0603]  18.29,180.72 180 top
R172  10k  [0603]  18.29,169.29 0 top
R173  1k  [0603]  34.67,170.18 180 top
R174  10k  [0603]  30.73,179.83 180 top
R175  10k  [0603]  30.73,181.36 180 top
R176  10k  [0603]  30.73,170.18 180 top
R177  10k  [0603]  30.73,168.66 0 top
R178  DNP  [0603]  8.76,169.55 90 top
R179  10k  [0603]  25.91,169.29 0 top
R180  10  [0603]  10.29,180.47 90 top
R181  10  [0603]  8.76,180.47 90 top
R182  10  [0603]  10.29,169.55 270 top
R183  2.2k  [0603]  45.34,166.12 270 top
R184  2.2k  [0603]  43.94,166.12 270 top
R185  10k  [0603]  49.28,180.72 180 top
R186  10k  [0603]  49.28,169.29 0 top
R187  1k  [0603]  65.66,170.18 180 top
R188  10k  [0603]  61.72,179.83 180 top
R189  10k  [0603]  61.72,181.36 180 top
R190  10k  [0603]  61.72,170.18 180 top
R191  10k  [0603]  61.72,168.66 0 top
R192  DNP  [0603]  39.75,169.55 90 top
R193  10k  [0603]  56.9,169.29 0 top
R194  10  [0603]  41.27,180.47 90 top
R195  10  [0603]  39.75,180.47 90 top
R196  10  [0603]  41.27,169.55 270 top
SW1  Rotary Encoder  [ENCODER_LED_3_KIT]  22.1,19.56 270 bottom
SW2  Rotary Encoder  [ENCODER_LED_3_KIT]  53.09,19.56 270 bottom
SW3  Rotary Encoder  [ENCODER_LED_3_KIT]  22.1,45.47 270 bottom
SW4  Rotary Encoder  [ENCODER_LED_3_KIT]  53.09,45.47 270 bottom
SW5  Rotary Encoder  [ENCODER_LED_3_KIT]  22.1,71.37 270 bottom
SW6  Rotary Encoder  [ENCODER_LED_3_KIT]  53.09,71.37 270 bottom
SW7  Rotary Encoder  [ENCODER_LED_3_KIT]  22.1,97.28 270 bottom
SW8  Rotary Encoder  [ENCODER_LED_3_KIT]  53.09,97.28 270 bottom
SW9  Rotary Encoder  [ENCODER_LED_3_KIT]  22.1,123.19 270 bottom
SW10  Rotary Encoder  [ENCODER_LED_3_KIT]  53.09,123.19 270 bottom
SW11  Rotary Encoder  [ENCODER_LED_3_KIT]  22.1,149.1 270 bottom
SW12  Rotary Encoder  [ENCODER_LED_3_KIT]  53.09,149.1 270 bottom
SW13  Rotary Encoder  [ENCODER_LED_3_KIT]  22.1,175.01 270 bottom
SW14  Rotary Encoder  [ENCODER_LED_3_KIT]  53.09,175.01 270 bottom
U1  ATTINY84-ARDUINO  [SO14]  53.72,19.56 180 top
U2  ATTINY84-ARDUINO  [SO14]  22.73,45.47 180 top
U3  ATTINY84-ARDUINO  [SO14]  53.72,45.47 180 top
U4  ATTINY84-ARDUINO  [SO14]  22.73,19.56 180 top
U5  ATTINY84-ARDUINO  [SO14]  22.73,71.37 180 top
U6  ATTINY84-ARDUINO  [SO14]  53.72,71.37 180 top
U7  ATTINY84-ARDUINO  [SO14]  22.73,97.28 180 top
U8  ATTINY84-ARDUINO  [SO14]  53.72,97.28 180 top
U9  ATTINY84-ARDUINO  [SO14]  22.73,123.19 180 top
U10  ATTINY84-ARDUINO  [SO14]  53.72,123.19 180 top
U11  ATTINY84-ARDUINO  [SO14]  22.73,149.1 180 top
U12  ATTINY84-ARDUINO  [SO14]  53.72,149.1 180 top
U13  ATTINY84-ARDUINO  [SO14]  22.73,175.01 180 top
U14  ATTINY84-ARDUINO  [SO14]  53.72,175.01 180 top
U$1  [QWIIC1]  36.96,20.45 0 bottom
U$2  [INT0]  36.45,15.11 0 bottom
U$3  [GND1]  15.75,8.51 90 bottom
U$4  [3#3V2]  18.29,8.51 90 bottom
U$5  [SDA8]  20.83,8.51 90 bottom
U$6  [SCL9]  23.37,8.51 90 bottom
U$7  [RST#-[>]  28.45,8.38 90 top
U$8  [I_SUPER2_C-()-03]  11.68,15.11 0 bottom
U$9  [INT#-[<]  25.91,8.38 90 top
U$10  [3#3V2]  49.28,8.51 90 top
U$11  [INT#-[<]  25.91,8.38 90 bottom
U$12  [TWIST2]  36.96,18.67 0 bottom
U$13  [GND1]  46.74,8.51 90 top
U$14  [QWIIC_TWIST1]  13.59,29.84 0 top
U$15  [SCL9]  54.36,8.51 90 top
U$16  [RST#-[>]  28.45,8.38 90 bottom
U$17  [PWR-()-03]  32.77,11.94 0 top
U$18  [ADR-()-03]  36.58,26.54 0 bottom
U$19  [SDA8]  51.82,8.51 90 top
U$20  [GND1]  46.74,8.51 90 bottom
U$21  [3#3V2]  18.29,8.51 90 top
U$22  [GND1]  15.75,8.51 90 top
U$23  [3#3V2]  49.28,8.51 90 bottom
U$24  [SDA8]  51.82,8.51 90 bottom
U$25  [SCL9]  54.36,8.51 90 bottom
U$26  [SCL9]  23.37,8.51 90 top
U$27  [SDA8]  20.83,8.51 90 top
U$28  [I_SUPER2_C-()-03]  42.67,15.11 0 bottom
U$29  [INT#-[<]  56.9,8.38 90 top
U$30  [INT#-[<]  56.9,8.38 90 bottom
U$31  [RST#-[>]  59.44,8.38 90 top
U$32  [RST#-[>]  59.44,8.38 90 bottom
U$33  [PWR-()-03]  63.75,11.94 0 top
U$34  [ADR-()-03]  67.56,26.54 0 bottom
U$35  [QWIIC-LOGO-MEDIUM]  41.66,19.56 0 bottom
U$36  [QWIIC1]  67.95,20.45 0 bottom
U$37  [TWIST2]  67.95,18.67 0 bottom
U$38  [QWIIC_TWIST1]  44.58,29.84 0 top
U$39  [INT0]  67.44,15.11 0 bottom
U$40  [3#3V2]  18.29,34.42 90 top
U$41  [GND1]  15.75,34.42 90 top
U$42  [SCL9]  23.37,34.42 90 top
U$43  [SDA8]  20.83,34.42 90 top
U$44  [GND1]  15.75,34.42 90 bottom
U$45  [3#3V2]  18.29,34.42 90 bottom
U$46  [SDA8]  20.83,34.42 90 bottom
U$47  [QWIIC-LOGO-MEDIUM]  10.67,19.56 0 bottom
U$48  [SCL9]  23.37,34.42 90 bottom
U$49  [I_SUPER2_C-()-03]  11.68,41.02 0 bottom
U$50  [INT#-[<]  25.91,34.29 90 top
U$51  [INT#-[<]  25.91,34.29 90 bottom
U$52  [RST#-[>]  28.45,34.29 90 top
U$53  [RST#-[>]  28.45,34.29 90 bottom
U$54  [PWR-()-03]  32.77,37.85 0 top
U$55  [ADR-()-03]  36.58,52.45 0 bottom
U$56  [QWIIC-LOGO-MEDIUM]  10.67,45.47 0 bottom
U$57  [QWIIC1]  36.96,46.35 0 bottom
U$58  [TWIST2]  36.96,44.58 0 bottom
U$59  [QWIIC_TWIST1]  13.59,55.75 0 top
U$60  [INT0]  36.45,41.02 0 bottom
U$61  [3#3V2]  49.28,34.42 90 top
U$62  [GND1]  46.74,34.42 90 top
U$63  [SCL9]  54.36,34.42 90 top
U$64  [SDA8]  51.82,34.42 90 top
U$65  [GND1]  46.74,34.42 90 bottom
U$66  [3#3V2]  49.28,34.42 90 bottom
U$67  [SDA8]  51.82,34.42 90 bottom
U$68  [SCL9]  54.36,34.42 90 bottom
U$69  [I_SUPER2_C-()-03]  42.67,41.02 0 bottom
U$70  [INT#-[<]  56.9,34.29 90 top
U$71  [INT#-[<]  56.9,34.29 90 bottom
U$72  [RST#-[>]  59.44,34.29 90 top
U$73  [RST#-[>]  59.44,34.29 90 bottom
U$74  [PWR-()-03]  63.75,37.85 0 top
U$75  [ADR-()-03]  67.56,52.45 0 bottom
U$76  [QWIIC-LOGO-MEDIUM]  41.66,45.47 0 bottom
U$77  [QWIIC1]  67.95,46.35 0 bottom
U$78  [TWIST2]  67.95,44.58 0 bottom
U$79  [QWIIC_TWIST1]  44.58,55.75 0 top
U$80  [INT0]  67.44,41.02 0 bottom
U$81  [3#3V2]  18.29,60.32 90 top
U$82  [GND1]  15.75,60.32 90 top
U$83  [SCL9]  23.37,60.32 90 top
U$84  [SDA8]  20.83,60.32 90 top
U$85  [GND1]  15.75,60.32 90 bottom
U$86  [3#3V2]  18.29,60.32 90 bottom
U$87  [SDA8]  20.83,60.32 90 bottom
U$88  [SCL9]  23.37,60.32 90 bottom
U$89  [I_SUPER2_C-()-03]  11.68,66.93 0 bottom
U$90  [INT#-[<]  25.91,60.2 90 top
U$91  [INT#-[<]  25.91,60.2 90 bottom
U$92  [RST#-[>]  28.45,60.2 90 top
U$93  [RST#-[>]  28.45,60.2 90 bottom
U$94  [PWR-()-03]  32.77,63.75 0 top
U$95  [ADR-()-03]  36.58,78.36 0 bottom
U$96  [QWIIC-LOGO-MEDIUM]  10.67,71.37 0 bottom
U$97  [QWIIC1]  36.96,72.26 0 bottom
U$98  [TWIST2]  36.96,70.48 0 bottom
U$99  [QWIIC_TWIST1]  13.59,81.66 0 top
U$100  [INT0]  36.45,66.93 0 bottom
U$101  [3#3V2]  49.28,60.32 90 top
U$102  [GND1]  46.74,60.32 90 top
U$103  [SCL9]  54.36,60.32 90 top
U$104  [SDA8]  51.82,60.32 90 top
U$105  [GND1]  46.74,60.32 90 bottom
U$106  [3#3V2]  49.28,60.32 90 bottom
U$107  [SDA8]  51.82,60.32 90 bottom
U$108  [SCL9]  54.36,60.32 90 bottom
U$109  [I_SUPER2_C-()-03]  42.67,66.93 0 bottom
U$110  [INT#-[<]  56.9,60.2 90 top
U$111  [INT#-[<]  56.9,60.2 90 bottom
U$112  [RST#-[>]  59.44,60.2 90 top
U$113  [RST#-[>]  59.44,60.2 90 bottom
U$114  [PWR-()-03]  63.75,63.75 0 top
U$115  [ADR-()-03]  67.56,78.36 0 bottom
U$116  [QWIIC-LOGO-MEDIUM]  41.66,71.37 0 bottom
U$117  [QWIIC1]  67.95,72.26 0 bottom
U$118  [TWIST2]  67.95,70.48 0 bottom
U$119  [QWIIC_TWIST1]  44.58,81.66 0 top
U$120  [INT0]  67.44,66.93 0 bottom
U$121  [3#3V2]  18.29,86.23 90 top
U$122  [GND1]  15.75,86.23 90 top
U$123  [SCL9]  23.37,86.23 90 top
U$124  [SDA8]  20.83,86.23 90 top
U$125  [GND1]  15.75,86.23 90 bottom
U$126  [3#3V2]  18.29,86.23 90 bottom
U$127  [SDA8]  20.83,86.23 90 bottom
U$128  [SCL9]  23.37,86.23 90 bottom
U$129  [I_SUPER2_C-()-03]  11.68,92.84 0 bottom
U$130  [INT#-[<]  25.91,86.11 90 top
U$131  [INT#-[<]  25.91,86.11 90 bottom
U$132  [RST#-[>]  28.45,86.11 90 top
U$133  [RST#-[>]  28.45,86.11 90 bottom
U$134  [PWR-()-03]  32.77,89.66 0 top
U$135  [ADR-()-03]  36.58,104.27 0 bottom
U$136  [QWIIC-LOGO-MEDIUM]  10.67,97.28 0 bottom
U$137  [QWIIC1]  36.96,98.17 0 bottom
U$138  [TWIST2]  36.96,96.39 0 bottom
U$139  [QWIIC_TWIST1]  13.59,107.57 0 top
U$140  [INT0]  36.45,92.84 0 bottom
U$141  [3#3V2]  49.28,86.23 90 top
U$142  [GND1]  46.74,86.23 90 top
U$143  [SCL9]  54.36,86.23 90 top
U$144  [SDA8]  51.82,86.23 90 top
U$145  [GND1]  46.74,86.23 90 bottom
U$146  [3#3V2]  49.28,86.23 90 bottom
U$147  [SDA8]  51.82,86.23 90 bottom
U$148  [SCL9]  54.36,86.23 90 bottom
U$149  [I_SUPER2_C-()-03]  42.67,92.84 0 bottom
U$150  [INT#-[<]  56.9,86.11 90 top
U$151  [INT#-[<]  56.9,86.11 90 bottom
U$152  [RST#-[>]  59.44,86.11 90 top
U$153  [RST#-[>]  59.44,86.11 90 bottom
U$154  [PWR-()-03]  63.75,89.66 0 top
U$155  [ADR-()-03]  67.56,104.27 0 bottom
U$156  [QWIIC-LOGO-MEDIUM]  41.66,97.28 0 bottom
U$157  [QWIIC1]  67.95,98.17 0 bottom
U$158  [TWIST2]  67.95,96.39 0 bottom
U$159  [QWIIC_TWIST1]  44.58,107.57 0 top
U$160  [INT0]  67.44,92.84 0 bottom
U$161  [3#3V2]  18.29,112.14 90 top
U$162  [GND1]  15.75,112.14 90 top
U$163  [SCL9]  23.37,112.14 90 top
U$164  [SDA8]  20.83,112.14 90 top
U$165  [GND1]  15.75,112.14 90 bottom
U$166  [3#3V2]  18.29,112.14 90 bottom
U$167  [SDA8]  20.83,112.14 90 bottom
U$168  [SCL9]  23.37,112.14 90 bottom
U$169  [I_SUPER2_C-()-03]  11.68,118.75 0 bottom
U$170  [INT#-[<]  25.91,112.01 90 top
U$171  [INT#-[<]  25.91,112.01 90 bottom
U$172  [RST#-[>]  28.45,112.01 90 top
U$173  [RST#-[>]  28.45,112.01 90 bottom
U$174  [PWR-()-03]  32.77,115.57 0 top
U$175  [ADR-()-03]  36.58,130.17 0 bottom
U$176  [QWIIC-LOGO-MEDIUM]  10.67,123.19 0 bottom
U$177  [QWIIC1]  36.96,124.08 0 bottom
U$178  [TWIST2]  36.96,122.3 0 bottom
U$179  [QWIIC_TWIST1]  13.59,133.48 0 top
U$180  [INT0]  36.45,118.75 0 bottom
U$181  [3#3V2]  49.28,112.14 90 top
U$182  [GND1]  46.74,112.14 90 top
U$183  [SCL9]  54.36,112.14 90 top
U$184  [SDA8]  51.82,112.14 90 top
U$185  [GND1]  46.74,112.14 90 bottom
U$186  [3#3V2]  49.28,112.14 90 bottom
U$187  [SDA8]  51.82,112.14 90 bottom
U$188  [SCL9]  54.36,112.14 90 bottom
U$189  [I_SUPER2_C-()-03]  42.67,118.75 0 bottom
U$190  [INT#-[<]  56.9,112.01 90 top
U$191  [INT#-[<]  56.9,112.01 90 bottom
U$192  [RST#-[>]  59.44,112.01 90 top
U$193  [RST#-[>]  59.44,112.01 90 bottom
U$194  [PWR-()-03]  63.75,115.57 0 top
U$195  [ADR-()-03]  67.56,130.17 0 bottom
U$196  [QWIIC-LOGO-MEDIUM]  41.66,123.19 0 bottom
U$197  [QWIIC1]  67.95,124.08 0 bottom
U$198  [TWIST2]  67.95,122.3 0 bottom
U$199  [QWIIC_TWIST1]  44.58,133.48 0 top
U$200  [INT0]  67.44,118.75 0 bottom
U$201  [3#3V2]  18.29,138.05 90 top
U$202  [GND1]  15.75,138.05 90 top
U$203  [SCL9]  23.37,138.05 90 top
U$204  [SDA8]  20.83,138.05 90 top
U$205  [GND1]  15.75,138.05 90 bottom
U$206  [3#3V2]  18.29,138.05 90 bottom
U$207  [SDA8]  20.83,138.05 90 bottom
U$208  [SCL9]  23.37,138.05 90 bottom
U$209  [I_SUPER2_C-()-03]  11.68,144.65 0 bottom
U$210  [INT#-[<]  25.91,137.92 90 top
U$211  [INT#-[<]  25.91,137.92 90 bottom
U$212  [RST#-[>]  28.45,137.92 90 top
U$213  [RST#-[>]  28.45,137.92 90 bottom
U$214  [PWR-()-03]  32.77,141.48 0 top
U$215  [ADR-()-03]  36.58,156.08 0 bottom
U$216  [QWIIC-LOGO-MEDIUM]  10.67,149.1 0 bottom
U$217  [QWIIC1]  36.96,149.99 0 bottom
U$218  [TWIST2]  36.96,148.21 0 bottom
U$219  [QWIIC_TWIST1]  13.59,159.38 0 top
U$220  [INT0]  36.45,144.65 0 bottom
U$221  [3#3V2]  49.28,138.05 90 top
U$222  [GND1]  46.74,138.05 90 top
U$223  [SCL9]  54.36,138.05 90 top
U$224  [SDA8]  51.82,138.05 90 top
U$225  [GND1]  46.74,138.05 90 bottom
U$226  [3#3V2]  49.28,138.05 90 bottom
U$227  [SDA8]  51.82,138.05 90 bottom
U$228  [SCL9]  54.36,138.05 90 bottom
U$229  [I_SUPER2_C-()-03]  42.67,144.65 0 bottom
U$230  [INT#-[<]  56.9,137.92 90 top
U$231  [INT#-[<]  56.9,137.92 90 bottom
U$232  [RST#-[>]  59.44,137.92 90 top
U$233  [RST#-[>]  59.44,137.92 90 bottom
U$234  [PWR-()-03]  63.75,141.48 0 top
U$235  [ADR-()-03]  67.56,156.08 0 bottom
U$236  [QWIIC-LOGO-MEDIUM]  41.66,149.1 0 bottom
U$237  [QWIIC1]  67.95,149.99 0 bottom
U$238  [TWIST2]  67.95,148.21 0 bottom
U$239  [QWIIC_TWIST1]  44.58,159.38 0 top
U$240  [INT0]  67.44,144.65 0 bottom
U$241  [3#3V2]  18.29,163.96 90 top
U$242  [GND1]  15.75,163.96 90 top
U$243  [SCL9]  23.37,163.96 90 top
U$244  [SDA8]  20.83,163.96 90 top
U$245  [GND1]  15.75,163.96 90 bottom
U$246  [3#3V2]  18.29,163.96 90 bottom
U$247  [SDA8]  20.83,163.96 90 bottom
U$248  [SCL9]  23.37,163.96 90 bottom
U$249  [I_SUPER2_C-()-03]  11.68,170.56 0 bottom
U$250  [INT#-[<]  25.91,163.83 90 top
U$251  [INT#-[<]  25.91,163.83 90 bottom
U$252  [RST#-[>]  28.45,163.83 90 top
U$253  [RST#-[>]  28.45,163.83 90 bottom
U$254  [PWR-()-03]  32.77,167.39 0 top
U$255  [ADR-()-03]  36.58,181.99 0 bottom
U$256  [QWIIC-LOGO-MEDIUM]  10.67,175.01 0 bottom
U$257  [QWIIC1]  36.96,175.9 0 bottom
U$258  [TWIST2]  36.96,174.12 0 bottom
U$259  [QWIIC_TWIST1]  13.59,185.29 0 top
U$260  [INT0]  36.45,170.56 0 bottom
U$261  [3#3V2]  49.28,163.96 90 top
U$262  [GND1]  46.74,163.96 90 top
U$263  [SCL9]  54.36,163.96 90 top
U$264  [SDA8]  51.82,163.96 90 top
U$265  [GND1]  46.74,163.96 90 bottom
U$266  [3#3V2]  49.28,163.96 90 bottom
U$267  [SDA8]  51.82,163.96 90 bottom
U$268  [SCL9]  54.36,163.96 90 bottom
U$269  [I_SUPER2_C-()-03]  42.67,170.56 0 bottom
U$270  [INT#-[<]  56.9,163.83 90 top
U$271  [INT#-[<]  56.9,163.83 90 bottom
U$272  [RST#-[>]  59.44,163.83 90 top
U$273  [RST#-[>]  59.44,163.83 90 bottom
U$274  [PWR-()-03]  63.75,167.39 0 top
U$275  [ADR-()-03]  67.56,181.99 0 bottom
U$276  [QWIIC-LOGO-MEDIUM]  41.66,175.01 0 bottom
U$277  [QWIIC1]  67.95,175.9 0 bottom
U$278  [TWIST2]  67.95,174.12 0 bottom
U$279  [QWIIC_TWIST1]  44.58,185.29 0 top
U$280  [INT0]  67.44,170.56 0 bottom

## Library data of the parts
C1 C3 C5 C6 C8 C9 C11 C12 C14 C15 C17 C18 C20 C21 C23 C24 C26 C27 C29 C30 C32 C33 C35 C36 C38 C39 C41 C42 = SparkFun-Capacitors; PROD_ID: CAP-00867
C2 C4 C7 C10 C13 C16 C19 C22 C25 C28 C31 C34 C37 C40 = SparkFun-Capacitors; PROD_ID: CAP-00810
D1-D14 = SparkFun-LED; PROD_ID: DIO-00819
E$1 E$2 LOGO1-LOGO42 = SparkFun-Aesthetics
E$3 = SparkFun-Retired
INT INT1-INT13 JP7 JP9 JP16 JP17 JP26 JP27 JP36 JP37 JP46 JP47 JP56 JP57 JP66 JP67 JP76 JP77 JP86 JP87 JP96 JP97 JP106 JP107 JP116 JP117 JP126 JP127 JP136 JP137 = SparkFun-Jumpers
J1 J2 J4 J8 J13 J15 J19 J21 J25 J27 J31 J33 J37 J39 J43 J45 J49 J51 J55 J57 J61 J63 J67 J69 J73 J75 J79 J81 = SparkFun-Connectors; PROD_ID: CONN-13694
J3 J6 J14 J20 J26 J32 J38 J44 J50 J56 J62 J68 J74 J80 = SparkX
J5 J7 J9-J12 J16-J18 J22-J24 J28-J30 J34-J36 J40-J42 J46-J48 J52-J54 J58-J60 J64-J66 J70-J72 J76-J78 J82-J84 = SparkFun-Connectors
JP1-JP6 JP8 JP10-JP15 JP18-JP25 JP28-JP35 JP38-JP45 JP48-JP55 JP58-JP65 JP68-JP75 JP78-JP85 JP88-JP95 JP98-JP105 JP108-JP115 JP118-JP125 JP128-JP135 JP138-JP140 = SparkFun
R1 R4 R5 R7-R11 R17 R18 R20-R25 R31 R32 R34-R39 R45 R46 R48-R53 R59 R60 R62-R67 R73 R74 R76-R81 R87 R88 R90-R95 R101 R102 R104-R109 R115 R116 R118-R123 R129 R130 R132-R137 R143 R144 R146-R151 R157 R158 R160-R165 R171 R172 R174-R179 R185 R186 R188-R193 = SparkFun-Resistors; PROD_ID: RES-00824
R2 R6 R15 R16 R29 R30 R43 R44 R57 R58 R71 R72 R85 R86 R99 R100 R113 R114 R127 R128 R141 R142 R155 R156 R169 R170 R183 R184 = SparkFun-Resistors; PROD_ID: RES-08272
R3 R19 R33 R47 R61 R75 R89 R103 R117 R131 R145 R159 R173 R187 = SparkFun-Resistors; PROD_ID: RES-07856
R12-R14 R26-R28 R40-R42 R54-R56 R68-R70 R82-R84 R96-R98 R110-R112 R124-R126 R138-R140 R152-R154 R166-R168 R180-R182 R194-R196 = SparkFun-Resistors; PROD_ID: RES-12581
SW1-SW14 = SparkFun-Switches; PROD_ID: RES-10859; SF_SKU: COM-10982
U1-U14 = SparkFun-IC-Microcontroller; PROD_ID: IC-14155
U$1 U$12 U$36 U$37 U$57 U$58 U$77 U$78 U$97 U$98 U$117 U$118 U$137 U$138 U$157 U$158 U$177 U$178 U$197 U$198 U$217 U$218 U$237 U$238 U$257 U$258 U$277 U$278 = buzzard_labels (53)
U$2 U$39 U$60 U$80 U$100 U$120 U$140 U$160 U$180 U$200 U$220 U$240 U$260 U$280 = buzzard_labels (56)
U$3-U$6 U$10 U$13 U$15 U$19-U$27 U$40-U$46 U$48 U$61-U$68 U$81-U$88 U$101-U$108 U$121-U$128 U$141-U$148 U$161-U$168 U$181-U$188 U$201-U$208 U$221-U$228 U$241-U$248 U$261-U$268 = Labels-0_04
U$7-U$9 U$11 U$16-U$18 U$28-U$35 U$47 U$49-U$56 U$69-U$76 U$89-U$96 U$109-U$116 U$129-U$136 U$149-U$156 U$169-U$176 U$189-U$196 U$209-U$216 U$229-U$236 U$249-U$256 U$269-U$276 = Labels
U$14 U$38 U$59 U$79 U$99 U$119 U$139 U$159 U$179 U$199 U$219 U$239 U$259 U$279 = buzzard_labels (54)